# Altium PCB main.PcbDoc
Units mm, origin at the board's own origin, x right, y up, seen from the top; angles counter-clockwise.
Board outline 50 x 50 mm, 2 copper layers (Top Layer, Bottom Layer); 45 components, 40 nets, 149 pads, 32 vias.
Unrouted connection lines stored in the file: 78.
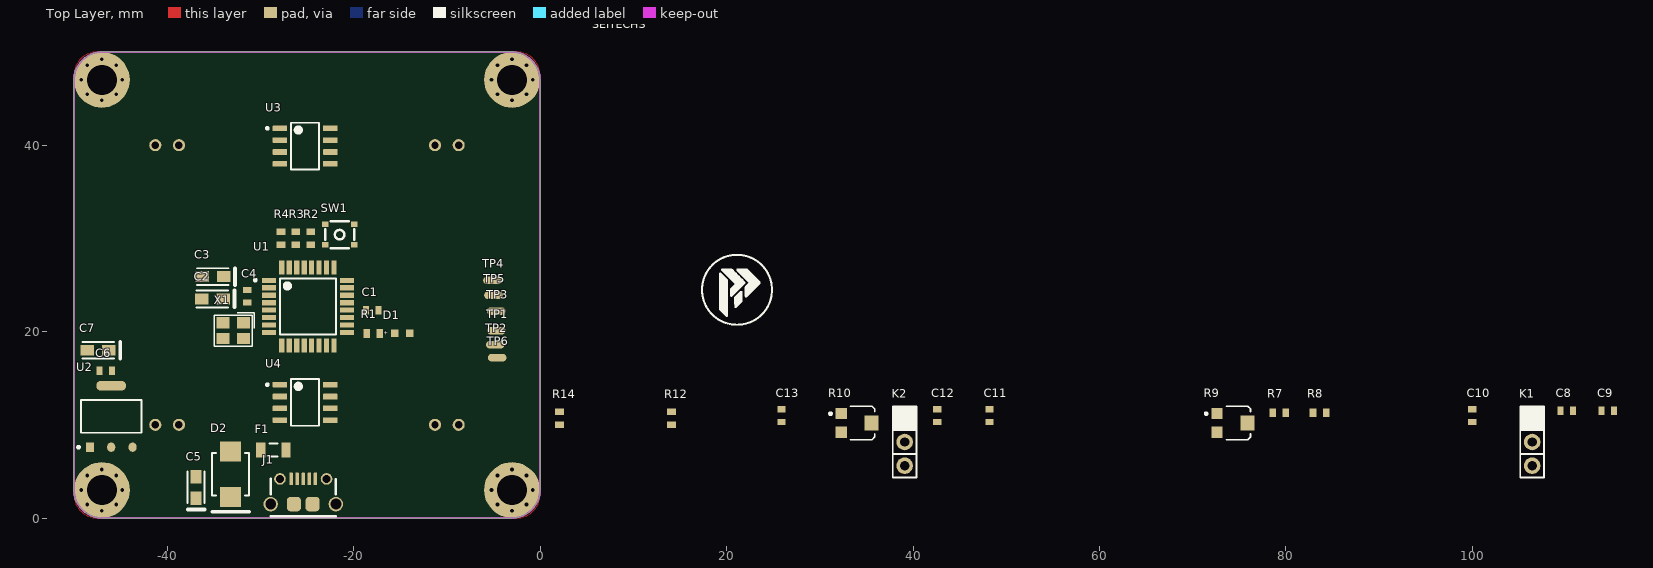
[diagram p0: Top Layer view]
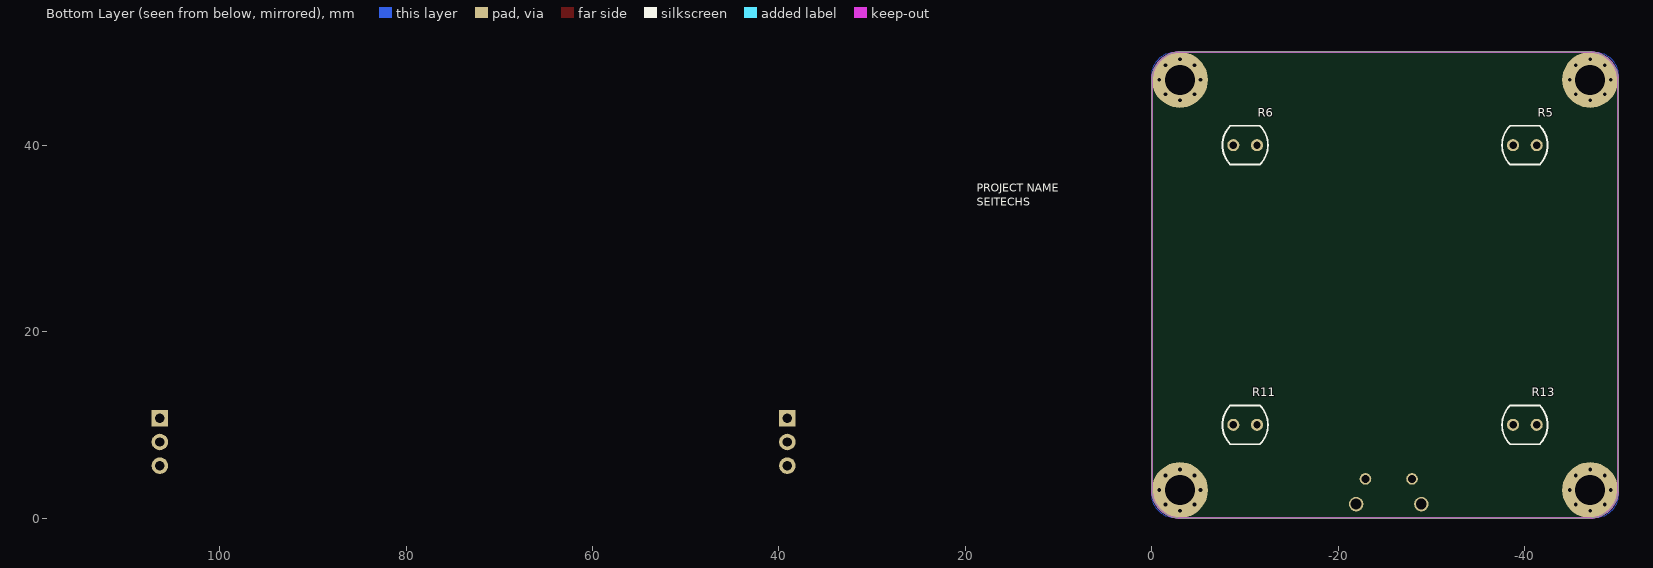
[diagram p1: Bottom Layer view, seen from below]

## Layer stack, top to bottom
Top Solder: solder mask 0.0102, Solder Resist, Dk 3.5
Top Layer: signal copper 0.0356
Dielectric 1: dielectric 0.32, FR-4, Dk 4.8
Bottom Layer: signal copper 0.0356
Bottom Solder: solder mask 0.0102, Solder Resist, Dk 3.5

## Board outline
-50,3.065 -50,46.927 cw(c-46.927,46.927) -46.927,50 -3.073,50 cw(c-3.073,46.927) 0,46.927 0,3.065 cw(c-3.065,3.065) -3.065,0 -46.935,0 cw(c-46.935,3.065)

## Design rules (kind name [scope] priority, off if disabled: settings)
Clearance Polygon [InPolygon] p1: gap=0.254 ignorepadtopadclearanceinfootprint=FALSE
Clearance "Fine Pitch" [InComponent('')] p2: gap=0.2 ignorepadtopadclearanceinfootprint=FALSE
Clearance [All] p3: gap=0.203 ignorepadtopadclearanceinfootprint=FALSE
MinimumSolderMaskSliver [All] p1 off: minsoldermaskwidth=0.254
PlaneConnect [All] p1: planeconnectstyle=Direct reliefexpansion=0.508 reliefentries=4 reliefconductorwidth=0.254 reliefairgap=0.254
PolygonConnect [All] p1: connectstyle=Direct reliefconductorwidth=0.254 reliefentries=4 polygonreliefangle="90 Angle" airgapwidth=0.254
RoutingVias [All] p1: holewidth=0.4 width=0.9 viastyle="Through Hole" minholewidth=0.4 minwidth=0.9 maxholewidth=0.4 maxwidth=0.9
SilkToSilkClearance [All] p1 off: silktosilkclearance=0.254
SilkToSolderMaskClearance [IsPad] p1 off: minsilkscreentomaskgap=0.254 clearancetoexposedcopper=TRUE
SolderMaskExpansion SolderMaskExpansion_Via [IsVia] p1: expansion=0.102 istentingtop=TRUE
SolderMaskExpansion [All] p2: expansion=0.102 istentingtop=FALSE
Width [All] p1: maxlimit=1.27 minlimit=0.203 preferedwidth=0.381
26 further rules are at their usual default settings.

## Components (designator, comment, footprint, x,y, rotation, side; value= is the part's Value field where it differs from the comment)
C1 "100nF/50V/0603" C0603_L -18,22.3 r0 top
C2 "4.7uF/16V/3216" KEMT-T491-A_L -35.15,23.5 r180 top
C3 "4.7uF/16V/3216" KEMT-T491-A_L -35.1,25.9 r180 top
C4 "100nF/50V/0603" C0603_L -31.4,23.8 r270 top
C5 "10uF/16V/3216" KEMT-T491-A_L -36.9,3.3 r90 top
C6 "100nF/50V/0603" C0603_L -46.6,15.8 r0 top
C7 "100uF/16V/3216" KEMT-T491-A_L -47.4,18 r180 top
C8 "100nF/50V/0603" C0603_L 110.1,11.5 r0 top
C9 "100nF/50V/0603" C0603_L 114.5,11.5 r0 top
C10 "100nF/50V/0603" C0603_L 100,11 r90 top
C11 "100nF/50V/0603" C0603_L 48.2,11 r90 top
C12 "100nF/50V/0603" C0603_L 42.6,11 r90 top
C13 "100nF/50V/0603" C0603_L 25.9,11 r90 top
D1 "Red, 2V" WL-SMCW_0603_H=0.7mm -14.8,19.8 r180 top
D2 "SL24A" GESC-GAP3SLT33-214-2_V -33.2,4.7 r270 top
F1 "1206L150THWR" R1206_L -28.6,7.3 r180 top
J1 "MICRO_USB" "USB MICRO" -25.4,4.2 r0 top
K1 "HEADER-1X3" HEADER-1X3 106.4,10.7 r0 top
K2 "HEADER-1X3" HEADER-1X3 39.1,10.7 r0 top
R1 "1k/0603" R0603_N -17.9,19.8 r180 top
R2 "1k/0603" R0603_N -24.6,30 r270 top
R3 "1k/0603" R0603_N -26.2,30 r270 top
R4 "1k/0603" R0603_N -27.8,30 r270 top
R5 "VT90N1" EXCE-VT90N1 -40,40 r180 bottom
R6 "VT90N1" EXCE-VT90N1 -10,40 r0 bottom
R7 "1k/0603" R0603_N 79.3,11.3 r0 top
R8 "1k/0603" R0603_N 83.6,11.3 r0 top
R9 "TC33X-2-103E" BOUR-TC33X-2_V 74.4,10.2 r0 top
R10 "TC33X-2-103E" BOUR-TC33X-2_V 34.1,10.2 r0 top
R11 "VT90N1" EXCE-VT90N1 -10,10 r0 bottom
R12 "1k/0603" R0603_N 14.1,10.7 r90 top
R13 "VT90N1" EXCE-VT90N1 -40,10 r180 bottom
R14 "1k/0603" R0603_N 2.1,10.7 r90 top
SW1 "SKSHAAE010" SW-SMD_4P-L3.2-W2.9-P2.20-LS3.4 -21.5,30.4 r0 top
TP1 "Test_Point" TESTPOINT_PROG -4.7,20.1 r90 top
TP2 "Test_Point" TESTPOINT_PROG -4.8,18.6 r90 top
TP3 "Test_Point" TESTPOINT_PROG -4.7,22.2 r90 top
TP4 "Test_Point" TESTPOINT_PROG -5.1,25.5 r90 top
TP5 "Test_Point" TESTPOINT_PROG -5,23.9 r90 top
TP6 "Test_Point" TESTPOINT_PROG -4.6,17.2 r90 top
U1 "ATmega328P-AU" FP-32A-MFG -24.9,22.7 r0 top
U2 "AMS1117-3.3" FP-AMS1117-IPC_C -46,10.9 r90 top
U3 "LM358DR" FP-D0008A-MFG -25.2,39.9 r0 top
U4 "LM358DR" FP-D0008A-MFG -25.2,12.4 r0 top
X1 "16MHz" CRYSTAL-SMD_4P-L3.2-W2.5-BL -32.9,20.1 r180 top

## Footprints (in the part's own frame and the unit in brackets; to place one, negate y for a bottom-side part, rotate by r counter-clockwise, add the part's x,y. Pads: shape width x height; smd on the part's side, far side on the other; paste and mask are expansions set on the pad)
BOUR-TC33X-2_V [mm] "SMD, 3-Leads, Body 3.8x3.6mm"
  rect 1.2x1.2 smd: 1(-1.8,1) 3(-1.8,-1)
  rect 1.5x1.6 smd: 2(1.45,0)
  silkscreen extent -3.07,-1.8 1.8,1.8, body extent -2,-1.8 1.96,1.8, height 1.15
C0603_L [mm] "Chip Capacitor, 2-Leads, Body 1.60x0.82mm, IPC High Density"
  rect 0.65x0.9 smd: 1(-0.675,0) 2(0.675,0)
  body extent -0.85,-0.48 0.85,0.48, height 0.6
CRYSTAL-SMD_4P-L3.2-W2.5-BL [mm]
  rect 1.4x1.2 smd: 1(-1.1,-0.85) 2(1.1,-0.85) 3(1.1,0.85) 4(-1.1,0.85)
  silkscreen extent -2.26,-1.91 2.03,1.68, body extent -1.6,-1.2 1.6,1.3, height 0.61
EXCE-VT90N1 [mm] "THD, 2-Leads, Body Width 4.17mm (Max), Height 2.29mm"
  round 1.3 hole 0.8: 1(-1.27,0) 2(1.27,0)
  silkscreen extent -2.44,-2.08 2.44,2.08, body extent -2.44,-2.09 2.44,2.09, height 2.29
FP-32A-MFG [mm]
  rect 1.5x0.55 smd paste+0 mask+0: 1(-4.2,2.8) 2(-4.2,2) 3(-4.2,1.2) 4(-4.2,0.4) 5(-4.2,-0.4) 6(-4.2,-1.2) 7(-4.2,-2) 8(-4.2,-2.8) 17(4.2,-2.8) 18(4.2,-2) 19(4.2,-1.2) 20(4.2,-0.4) 21(4.2,0.4) 22(4.2,1.2) 23(4.2,2) 24(4.2,2.8)
  rect 0.55x1.5 smd paste+0 mask+0: 9(-2.8,-4.2) 10(-2,-4.2) 11(-1.2,-4.2) 12(-0.4,-4.2) 13(0.4,-4.2) 14(1.2,-4.2) 15(2,-4.2) 16(2.8,-4.2) 25(2.8,4.2) 26(2,4.2) 27(1.2,4.2) 28(0.4,4.2) 29(-0.4,4.2) 30(-1.2,4.2) 31(-2,4.2) 32(-2.8,4.2)
  silkscreen extent -5.77,-3 3,3, body extent -5.05,-5.05 5.05,5.05, height 0.25
FP-AMS1117-IPC_C [mm]
  rect 1.004x0.872 smd paste+0 mask+0: 1(-3.295,2.29)
  rrect100% 1.004x0.872 smd paste+0 mask+0: 2(-3.295,0) 3(-3.295,-2.29)
  rrect87% 1.004x3.182 smd paste+0 mask+0: 4(3.295,0)
  silkscreen extent -3.42,-3.25 1.75,3.62, body extent -3.9,-3.35 3.9,3.35, height 0.25
FP-D0008A-MFG [mm]
  rrect17% 1.55x0.6 smd paste+0 mask+0: 1(-2.7,1.905) 2(-2.7,0.635) 3(-2.7,-0.635) 4(-2.7,-1.905) 5(2.7,-1.905) 6(2.7,-0.635) 7(2.7,0.635) 8(2.7,1.905)
  silkscreen extent -4.17,-2.5 1.5,2.5, body extent -3.57,-2.75 3.57,2.75, height 0.25
GESC-GAP3SLT33-214-2_V [mm] "Molded Diode, 2-Leads, Body 4.57x3.94mm"
  rect 2.16x2.26 smd: 1(-2.45,0) 2(2.45,0)
  silkscreen extent -2.29,-1.97 4.03,1.97, body extent -2.5,-1.97 2.5,1.97, height 2.2
HEADER-1X3 [mil]
  rect 70x70 hole 40: 1(0,0)
  round 70 hole 40: 2(0,-100) 3(0,-200)
  silkscreen extent -50,-250 50,50, body extent -50,-250 50,50, height 470
KEMT-T491-A_L [mm] "Molded Capacitor, 2-Leads, Body 3.40x1.80mm, IPC High Density"
  rect 1.45x1.15 smd: 1(-1.15,0) 2(1.15,0)
  silkscreen extent -2.37,-0.9 1.7,0.9, body extent -1.7,-0.91 1.7,0.89, height 1.78
R0603_N [mm]
  rect 0.7x0.95 smd: 1(-0.7,0) 2(0.7,0)
  body extent -0.85,-0.48 0.85,0.47, height 0.6
R1206_L [mm] "Chip Resistor, 2-Leads, Body 3,13x1,55mm, IPC High Density"
  rect 1x1.6 smd: 1(-1.35,0) 2(1.35,0)
  silkscreen extent -0.45,-0.7 0.45,0.7, body extent -1.63,-0.82 1.63,0.83, height 0.6
SW-SMD_4P-L3.2-W2.9-P2.20-LS3.4 [mm]
  rect 0.7x0.6 smd: 1(-1.55,1.1) 2(-1.55,-1.1) 3(1.55,1.1) 4(1.55,-1.1)
  silkscreen extent -1.55,-1.45 1.55,1.45, body extent -1.72,-1.46 1.72,1.5, height 0.41
TESTPOINT_PROG [mm]
  oval 0.8x2 smd: 0(0,0)
"USB MICRO" [mm]
  rrect50% 0.4x1.35 smd: 1(-1.3,0) 2(-0.65,0) 3(0,0) 4(0.65,0) 5(1.3,0)
  round 1.55 hole 1.15: shd(-3.5,-2.7) shd(3.5,-2.7)
  round 1.25 hole 0.85: shd(-2.5,0) shd(2.5,0)
  rrect50% 1.5x1.55 smd: shd(-1,-2.7) shd(1,-2.7)
  silkscreen extent -3.5,-4 3.5,0, body extent -3.96,-5.1 4.01,0.33, height 2.68
WL-SMCW_0603_H=0.7mm [mm] "SMD Mono-color Chip LED, body 1.6x0.8mm"
  rect 0.8x0.8 smd: 1(-0.8,0) 2(0.8,0)
  body extent -0.8,-0.4 0.8,0.4, height 0.7

## Part data
C1 C4 C6 C8 C9 C10 C11 C12 C13: library part C_SMD
C2 C3 C5 C7: library part CMP-2000-07187-1, "Tantalum Capacitor, 2.2 uF, +/- 10%, 16 V, -55 to 125 degC, 2-Pin SMD, RoHS, Tape and Reel", Capacitance=2200000pF, Case Code=A, Case Style=Molded, Manufacturer=Kemet, Operating Temp Range=-55Cto125C, Package / Case=3216-18, Package Description="2-Pin Surface Mount Device, Body 3.2 x 1.6 mm", Package Reference=T491-A, Tolerance (+ or -)=10%, Voltage=16VDC, Construction=SMTChip, Datasheet URL=http://capacitoredge.kemet.com/capedge2/DataSheet/Datasheet-T491A225K016AT.pdf?pn=T491A225K016AT, Datasheet Version=10/2016, DCL=0.4uA, DF=6%, ESR=6ohm, Failure Rate=NotRequired, Insulation=NotRequired, Lead Spacing (nom)=NotRequiredmm, Length W/Weld=NotRequiredmm, Length W/Weld (max)=NotRequiredmm, Manufacturer URL=http://www.kemet.com/, Mounting Style=SurfaceMount, Mounting Technology=SurfaceMount, Packaging=TapeandReel, Polarity=Polar, Product Depth (mm)=1.6mm, Product Diameter (mm)=NotRequiredmm, Product Height (mm)=1.6mm, Product Length (mm)=3.2mm, Rad Hardened=No, Seal=NotRequired, Seated Plane Height=NotRequiredmm, Wire Form=NotRequired
D1: library part 150060RS75000, "WL-SMCW SMT Mono-color Chip LED Waterclear, size 0603, Red, 2V, 140deg", Emitting Color=Red, Forward Voltage typ.=2V, Operating Temperature="-40 to +85degC", Chip Technology=AlInGaP, ComponentLink1Description=Manufacturer, ComponentLink1URL=http://www.we-online.de, ComponentLink2Description=Datasheet, ComponentLink2URL=https://www.we-online.com/catalog/datasheet/150060RS75000.pdf, Dominant Wavelength typ.=625nm, Luminous Intensity typ.=250mcd, Mounting Technology=SMT, Packaging="Tape and Reel", Part Number=150060RS75000, Peak Wavelength typ.=630nm, Published Date="December 2019", Publisher="Wurth Elektronik", Size=0603, Viewing Angle=140deg
D2: library part CMP-2000-05135-2, "40V 2A 420mV @ 2A SMA(DO-214AC) Schottky Barrier Diodes (SBD) RoHS", If - Forward Current=0.3A, Ifsm - Forward Surge Current=10A, Ir - Reverse Current=100uA, Manufacturer=GeneSiCSemiconductor, Maximum Operating Temperature=+175C, Minimum Operating Temperature=-55C, Operating Temperature Range=-55Cto+175C, Package / Case=DO-214AA, Package Description="2-Pin Chip, Body 4.57 x 3.94 mm", Package Version="Rev. 1, 11/2013", Pd - Power Dissipation=25W, Vf - Forward Voltage=4V, Vrrm - Repetitive Reverse Voltage=3300V, Brand=GeneSiCSemiconductor, Configuration=Single, Datasheet URL=https://datasheet.ciiva.com/24141/gap3slt33-214-271329-24141300.pdf, Datasheet Version="Rev. 1, 11/2013", Factory Pack Quantity=2500, Manufacturer URL=http://www.genesicsemi.com/, Mounting Style=SMD/SMT, Package URL=https://datasheet.ciiva.com/24141/gap3slt33-214-271329-24141300.pdf, Packaging=Reel, Product=SchottkySiliconCarbideDiodes, Product Category=SchottkyDiodes&Rectifiers, RoHS=True, Series=GAP3SLT33, Technology=SiC, trr - Reverse Recovery time=60ns, Unit Weight=0.003284oz
F1: "FUSE PTC RESET 8V 1.50A 1206", Current - Hold (Ih) (Max)=1.5A, Current - Max=100A, Current - Trip (It)=3A, Manufacturer="Littelfuse Inc", Package / Case="1206 (3216 Metric), Concave, Long Side Terminals", Supplier Part Number 1=F3372CT-ND, Voltage - Max=8V, Category="Circuit Protection", ComponentLink1Description=http://www.littelfuse.com/~/media/electronics/datasheets/resettable_ptcs/littelfuse_ptc_1206l_datasheet.pdf.pdf, ComponentLink1URL=http://www.littelfuse.com/~/media/electronics/datasheets/resettable_ptcs/littelfuse_ptc_1206l_datasheet.pdf.pdf, Manufacturer Part Number=1206L150THWR, Packaging="Cut Tape (CT)", Pricing 1="1=0.49, 10=0.462, 25=0.4256, 50=0.3892, 100=0.3234, 250=0.294, 500=0.2492, 1000=0.2198 (USD)", R Min/Max="0.040 ~ 0.120 Ohm", RoHS="RoHS Compliant", Stock 1=8140, Supplier 1=Digi-Key, Time to Trip=0.3s
J1: "CONN USB MICRO B RECPT SMT R/A", Manufacturer=FCI, Manufacturer Part Number=10118194-0001LF, Supplier Part Number 1=609-4618-1-ND, Category="Connectors, Interconnects", ComponentLink1Description=http://portal.fciconnect.com/Comergent//fci/drawing/10118194.pdf, ComponentLink1URL=http://portal.fciconnect.com/Comergent//fci/drawing/10118194.pdf, Connector Type="USB - micro B", Features="Shielded, Solder Retention", Gender=Receptacle, Ingress Protection=-, Mounting Type="Surface Mount, Right Angle, Horizontal", Number of Contacts=5, Packaging="Cut Tape (CT)", Pricing 1="1=0.46, 10=0.433, 25=0.3712, 50=0.3156, 100=0.3032, 250=0.27224, 500=0.25988 (USD)", RoHS="RoHS Compliant", Specifications="USB 2.0", Stock 1=9139, Supplier 1=Digi-Key
K1 K2: Supplier Part Number 1=S1011E-36-ND, Supplier 1=Digi-Key
R1 R2 R3 R4 R7 R8 R12 R14: library part R_SMD
R5 R6 R11 R13: library part CMP-2000-07406-1, "Photoconductive Resistor, 200 kOhm, 100 V, 80 mW, -40 to 75 degC, 2-Pin THD, RoHS", Dark Resistance=200kohm, Manufacturer="Excelitas Technology", Operating Temperature Max=75°C, Operating Temperature Min=-40°C, Package Description="2-Pin Through Hole Device, Body Width 4.17 mm (Max), Height 2.29 mm", Power Rating=80mW, Resistance @ Lux=12kohm, Resistor Case Style=-, Voltage Rating=100V, Datasheet URL=http://datasheet.octopart.com/VT90N1-Excelitas-datasheet-10388451.pdf, Datasheet Version=09/2006, Manufacturer URL=http://www.excelitas.com/Pages/Index.aspx, Mounting Technology=ThroughHole, Package Reference=VT90N1, Packaging=Each, Product Range=-, SVHC=Cadmiumchloride(15-Jun-2015)
R9 R10: library part CMP-2100-03695-1, "Trimming Potentiometer, 10000 Ohm, -40 to 100 degC, 3-Pin SMD, RoHS, Tape and Reel", Case/Package=SMD/SMT, Colour=Silver, Manufacturer=Bourns, Max Operating Temperature=100degC, Max Power Dissipation=100mW, Min Operating Temperature=-40degC, Package Description="3-Pin Surface Mount Device, Body 3.8 x 3.6 mm", Package Quantity=2500, Package Reference=TC33X-2, Resistance=10KOhm, Temperature Coefficient=250ppm/degreesC, Tolerance=25%, Voltage Rating (DC)=50V, Composition=Potentiometer, Contact Plating=Silver, Datasheet URL=http://www.bourns.com/docs/Product-Datasheets/TC33.pdf, Datasheet Version=42583.0, Depth=3.8mm, Height=0.047inch, Lead Free=LeadFree, Length=3mm, Manufacturer URL=http://www.bourns.com/, Military Standard=Not, Mount=SurfaceMount, Number of Turns=1, Packaging=TapeandReel, Power Rating=100mW, Radiation Hardening=No, REACH SVHC=NoSVHC, RoHSCompliant=true, Taper=Linear, Termination=FootPrint, Weight=29.4mg, Width=0.118inch
SW1: "SWITCH", BOM_Manufacturer="ALPS Electric", BOM_Manufacturer Part=SKSHAAE010, BOM_Supplier=LCSC, BOM_Supplier Part=C262415, Contributor=LCSC, spicePre=S, spiceSymbolName=SKSHAAE010
U1: library part CMP-06276-000013-1, "IC MCU 8BIT 32KB FLASH 32TQFP", Frequency=20MHz, Manufacturer=Microchip, Max Supply Voltage=5.5V, Min Supply Voltage=1.8V, Nominal Supply Current=0.04-5.2mA, Package=32A, Temperature="-40°C to +85°C", Temperature Range High=+85°C, Temperature Range Low=-40°C, Automotive=No, Category=IC, ComponentLink2Description=Datasheet, ComponentLink2URL=http://ww1.microchip.com/downloads/en/DeviceDoc/ATmega48A-PA-88A-PA-168A-PA-328-P-DS-DS40002061A.pdf, Core Architecture=AVR, Data Bus Width=8bits, Device Class L1="Integrated Circuits (ICs)", Device Class L2="Embedded Processors and Controllers", Device Class L3=Microcontrollers, Digikey Description="IC MCU 8BIT 32KB FLASH 32TQFP", Footprint Url=http://ww1.microchip.com/downloads/en/appnotes/atmel-8826-seeprom-pcb-mounting-guidelines-surface-mount-packages-applicationnote.pdf, Height=1.2mm, Interface=I2C,SPI,UART,USART,2-Wire, Ipc Land Pattern Name=QFP80P900X900X120-32, Lead Free=Yes, Manufacturer Part Number=ATmega328P-AU, Memory Size=32KBytes, Memory Type=FLASH, Mouser Description="ATmega Series 32 KB Flash 2 KB SRAM 20 MHz 8-Bit Microcontroller - TQFP-32", Number Of A/D Converters=1, Number Of Adc Channels=8, Number Of Cores=1, Number Of I2C Channels=1, Number Of I/Os=23, Number Of Pwm Channels=6, Number Of Spi Channels=1, Number Of Timers/Counters=3, Number Of Uart Channels=1, Octopart=https://octopart.com/atmega328p-au-microchip-77760215, Ram Size=2KBytes, RoHS=TRUE, Standoff Height=0.05mm
U2: library part CMP-209535-000001-1, "LDO Voltage Regulators 1A, 3.3V", Dropout Voltage=1.1V, Manufacturer="Advanced Monolithic Systems", Max Junction Temp=+125°C, Max Power Dissipation=1.2W, Max Supply Voltage=15V, Nominal Supply Current=5mA, Output Current=1A, Output Voltage=3.3V, Package=AMS1117, Temperature="-40°C to +125°C", Temperature Range Low=-40°C, Automotive=No, Category=IC, ComponentLink2Description=Datasheet, ComponentLink2URL=http://www.advanced-monolithic.com/pdf/ds1117.pdf, Device Class L1="Integrated Circuits (ICs)", Device Class L2="Power Management ICs", Device Class L3="Voltage Regulators - Linear", Height=1.8mm, Ipc Land Pattern Name=SOT229P700X180-4, Lead Free=Yes, Manufacturer Part Number=AMS1117-3.3, Number Of Outputs=1, Octopart=https://octopart.com/ams1117-3.3-advanced+monolithic+systems-25899300, Output Type=Fixed, RoHS=TRUE, Standoff Height=0.64mm, Temperature Range High=+125°C
U3 U4: library part CMP-1685-00009-2, "IC OPAMP GP 2 CIRCUIT 8SOIC", Case/Package=SOIC, Dual Supply Voltage=9V, Input Bias Current=250nA, Input Offset Voltage (Vos)=7mV, Max Dual Supply Voltage=16V, Max Operating Temperature=70°C, Max Supply Voltage=32V, Min Dual Supply Voltage=1.5V, Min Operating Temperature=0°C, Min Supply Voltage=3V, Nominal Supply Current=1.2mA, Operating Supply Current=1mA, Output Current=30mA, Package Quantity=2500, Power Supply Rejection Ratio (PSRR)=65dB, Voltage Gain=100dB, Bandwidth=700kHz, Common Mode Rejection Ratio=65dB, Contact Plating=Gold, Gain Bandwidth Product=700kHz, Height=1.58mm, Lead Free="Lead Free", Length=4.9mm, Mount="Surface Mount", Number of Amplifiers=2, Number of Channels=2, Number of Circuits=2, Number of Elements=2, Number of Pins=8, Operating Supply Voltage=16V, Output Current per Channel=30mA, Packaging="Tape and Reel", Radiation Hardening=No, REACH SVHC="No SVHC", Slew Rate=0.3V/µs, Unity Gain Bandwidth Product=700kHz, Width=3.91mm
X1: BOM_JLCPCB Part Class="Extended Part", BOM_Manufacturer=YXC, BOM_Manufacturer Part=X322516MOB4SI, BOM_Paste Type="Extended Part", BOM_Supplier=LCSC, BOM_Supplier Part=C12668, nameAlias=Frequency, spicePre=X, spiceSymbolName=X322516MOB4SI

## Free pads (board coordinates)
  round 6 hole 3.2: 3(-47,3) 3(-47,47) 3(-3,3) 3(-3,47)

## Via types
v1: diameter 0.9, hole 0.4, Top Layer to Bottom Layer, tented both sides, 32 vias

## Nets (pads, with @x,y where several pads share a name; then routed paths per layer and width w, separated by ;. In a path a pad name is that pad's centre, name@x,y a point inside that pad or via, vN(x,y) a via of type N, cw(c..) or ccw(c..) an arc to the next point about the centre after c; other vN are vias at no path point)
3V3: C6.2 C7.1 U2.2 U2.4
5V: C2.1 C3.1 C4.2 C5.1 C8.2 C9.2 C10.2 C12.2 D2.2 K1.2 K2.2 R2.1 R5.2 R6.2 R9.1 R10.1 R11.2 R13.2 TP5.0 U1.4 U1.6 U1.18 U2.3 U3.8 U4.8
A0: U1.23 U3.1 U3.2
A1: U1.24 U4.1 U4.2
A2: U1.25 U3.6 U3.7
A3: U1.26 U4.6 U4.7
A4: C11.2 R9.2 U1.27
A5: C13.2 R10.2 U1.28
A6: U1.19
A7: U1.22
AREF: C1.1 U1.20
D0/RX: R3.2 U1.30
D1/TX: R4.2 U1.31
D2: U1.32
D3: U1.1
D4: U1.2
D5: U1.9
D6: U1.10
D7: U1.11
D8: U1.12
D9: K1.3 U1.13
D10: K2.3 U1.14
D11/MOSI: TP2.0 U1.15
D12/MISO: TP1.0 U1.16
D13/SCK: R1.2 TP3.0 U1.17
DM: J1.2
DP: J1.3
GND: C1.2 C2.2 C3.2 C4.1 C5.2 C6.1 C7.2 C8.1 C9.1 C10.1 C11.1 C12.1 C13.1 D1.1 J1.5 J1.shd K1.1 K2.1 pad.3 R7.1 R8.1 R9.3 R10.3 R12.1 R14.1 SW1.3 TP6.0 U1.3 U1.5 U1.21 U2.1 U3.4 U4.4 X1.2 X1.4
  other v1: -47,0.8 -3,0.8 -48.556,1.444 -45.444,1.444 -4.556,1.444 -1.444,1.444 -49.2,3 -44.8,3 -5.2,3 -0.8,3 -48.556,4.556 -45.444,4.556 -4.556,4.556 -1.444,4.556 -47,5.2 -3,5.2 -47,44.8 -3,44.8 -48.556,45.444 -45.444,45.444 -4.556,45.444 -1.444,45.444 -49.2,47 -44.8,47 -5.2,47 -0.8,47 -48.556,48.556 -45.444,48.556 -4.556,48.556 -1.444,48.556 -47,49.2 -3,49.2
NANO_RST: R2.2 SW1.2 TP4.0 U1.29
NetD1_2: D1.2 R1.1
NetF1_1: F1.1 J1.1
NetR5_1: R5.1 R7.2 U3.3
NetR6_1: R6.1 R8.2 U3.5
NetR11_1: R11.1 R12.2 U4.5
NetR13_1: R13.1 R14.2 U4.3
RX_NANO: R3.1
TX_NANO: R4.1
VUSB: D2.1 F1.2
XTAL1: U1.7 X1.1
XTAL2: U1.8 X1.3
pads on no net: J1.4 SW1.1 SW1.4

## Polygon pours and split planes (outlines as drawn)
GND on Top Layer "NONET_L01_P013" (solid, remove dead copper, shelved, pour order 13): -47.46,0 -2.54,0 ccw(c-2.54,2.54) 0,2.54 0,47.46 ccw(c-2.54,47.46) -2.54,50 -47.46,50 ccw(c-47.46,47.46) -50,47.46 -50,2.54 ccw(c-47.46,2.54)
GND on Bottom Layer "NONET_L02_P015" (solid, remove dead copper, shelved, pour order 15): -47.46,0 -2.54,0 ccw(c-2.54,2.54) 0,2.54 0,47.46 ccw(c-2.54,47.46) -2.54,50 -47.46,50 ccw(c-47.46,47.46) -50,47.46 -50,2.54 ccw(c-47.46,2.54)

## Keep-outs
Keep-Out Layer:
  lines w0.2: -50,3.065 ccw(c-46.935,3.065) -46.935,0 -3.065,0 ccw(c-3.065,3.065) 0,3.065 0,46.927 ccw(c-3.073,46.927) -3.073,50 -46.927,50 ccw(c-46.927,46.927) -50,46.927 -50,31.2 -50,3.065

## Silkscreen, mask and mechanical layers (free items; w line width, h text height)
Top Overlay:
  drawing of 5 lines, arcs and shapes, not listed
  text "V1.0. Rev A /  / 2021.03.28" at 7.6,57.8 h1.5
  text "PROJECT NAME / SEITECHS" at 5.6,52.2 h1.5
Bottom Overlay:
  text "PROJECT NAME / SEITECHS" at 18.8,33.2 h1.5

## Dimensions
-47,3 to -46.935,0 on Mechanical 1
-47,3 to -50,3.065 on Mechanical 1
-3.073,50 to -3.065,0 on Mechanical 1
-50,46.927 to 0,46.927 on Mechanical 1

## Text inside footprints (layer, text, board x,y; h text height)
D1: Top Overlay "+" at -16.9,20.1 h0.76 r270